# Altium PCB stm32f103.PcbDoc (part 1 of 2)
Units mm, origin at the board's own origin, x right, y up, seen from the top; angles counter-clockwise.
Board outline 73.39 x 86.21 mm, 2 copper layers (Top Layer, Bottom Layer); 96 components, 127 nets, 522 pads, 347 vias.
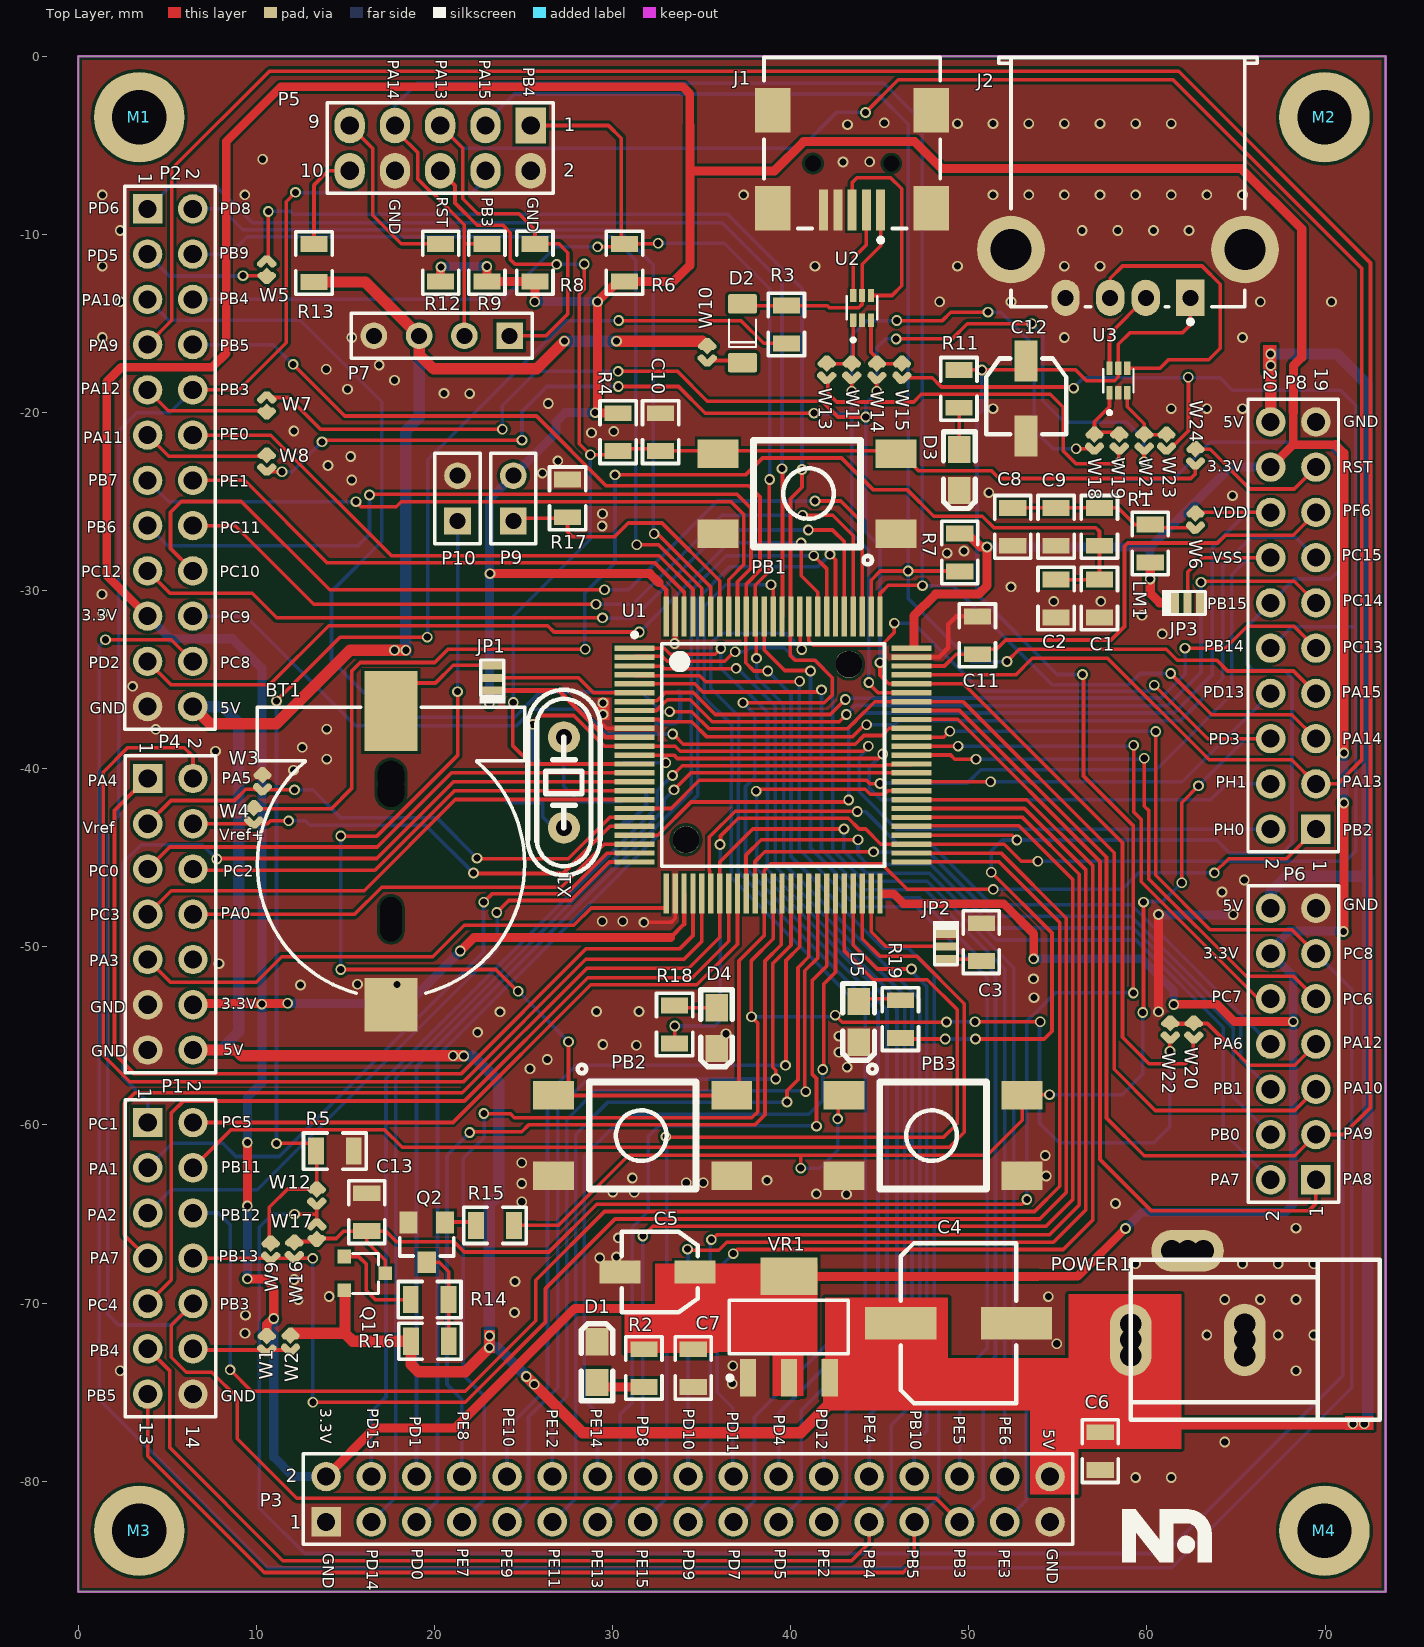
[diagram p0: Top Layer view]
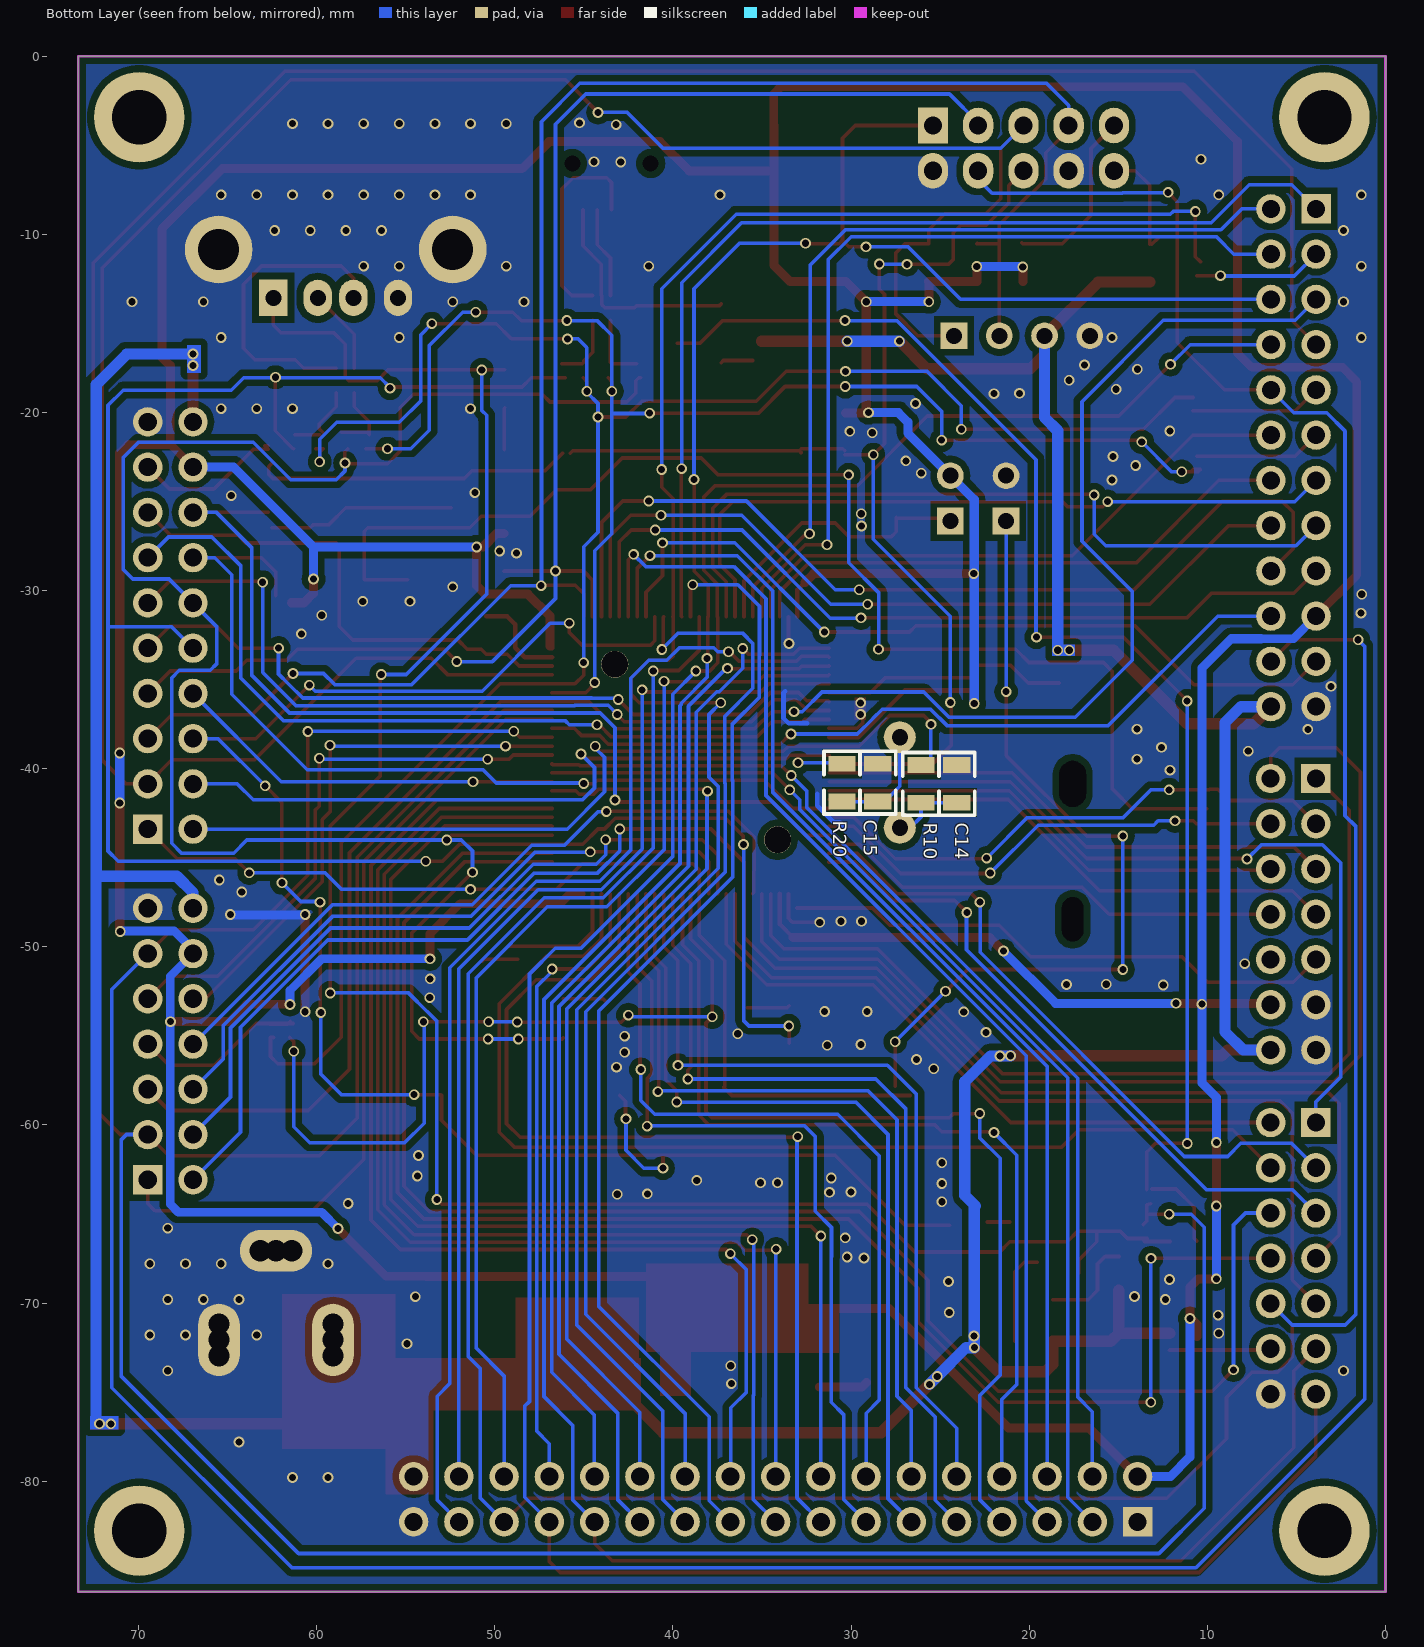
[diagram p1: Bottom Layer view, seen from below]
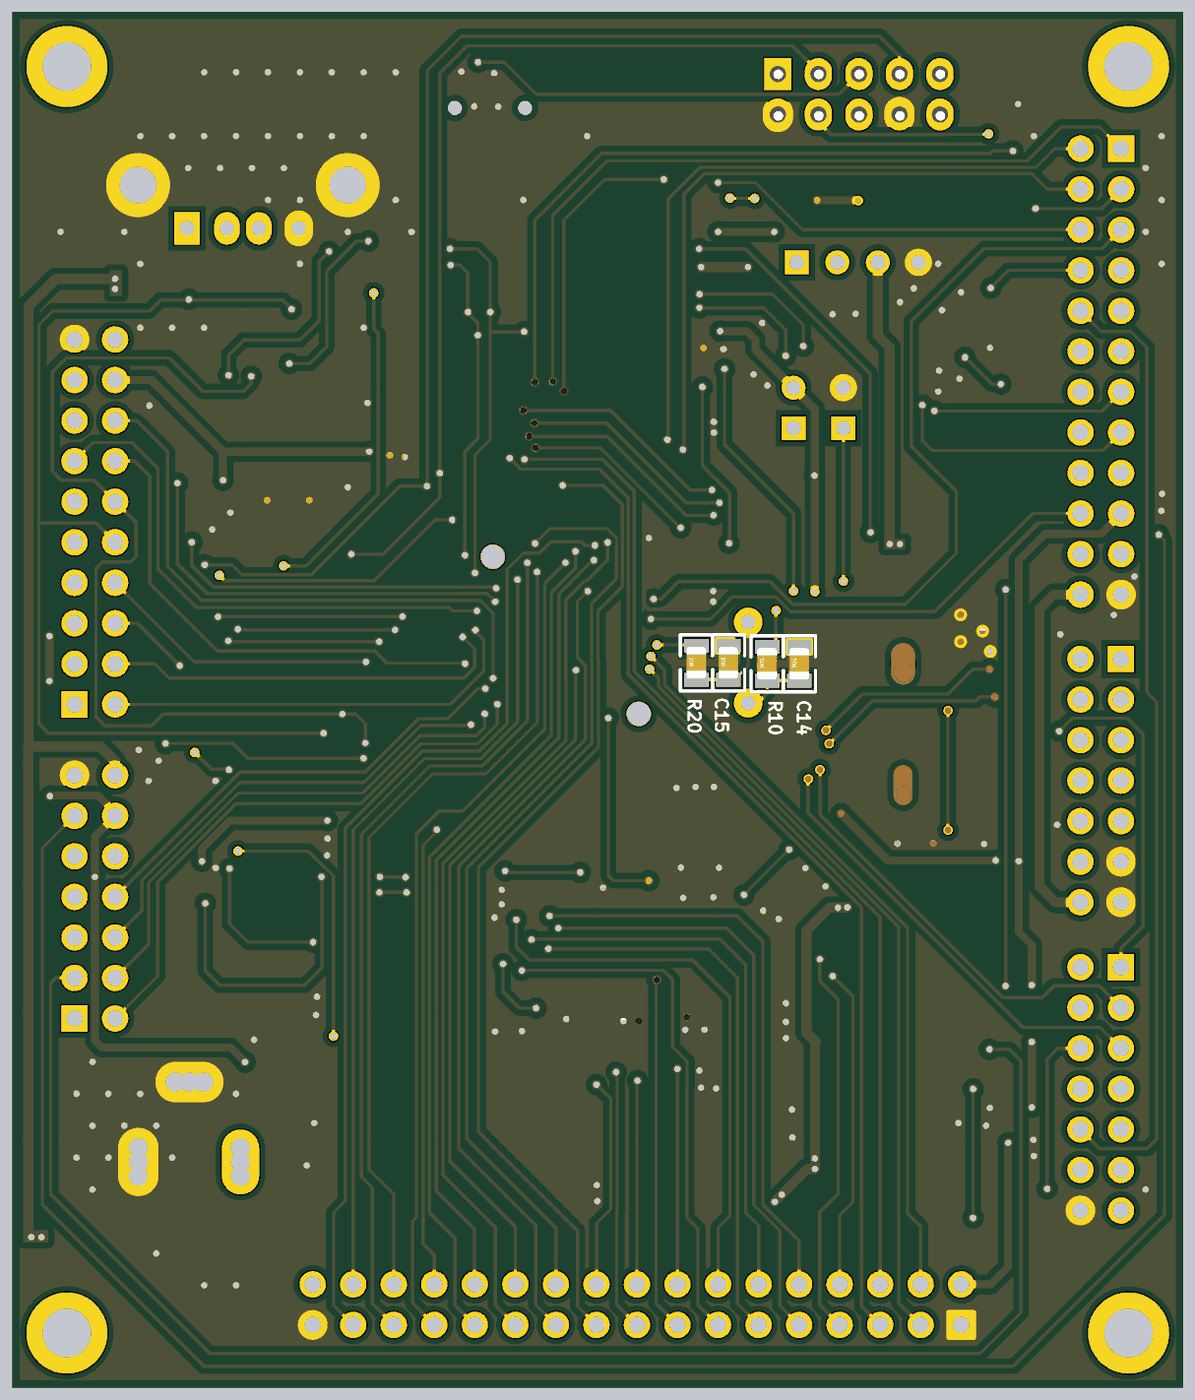
[diagram p3: 3D render of the assembled board from below, using the file's embedded part models]

## Layer stack, top to bottom
Top Layer: signal copper 0.0356
Dielectric: dielectric 0.32, FR-4, Dk 4.8
Bottom Layer: signal copper 0.0356

## Board outline
0,-84.517 0,0 73.392,0 73.392,-86.209 0,-86.209

## Design rules (kind name [scope] priority, off if disabled: settings)
Clearance [All] p1: gap=0.165
ComponentClearance [All] p1: gap=0 collisioncheckmode=3 verticalgap=0 showdistances=FALSE
PolygonConnect [All] p1: connectstyle=Direct reliefconductorwidth=0.254 reliefentries=4 polygonreliefangle="90 Angle"
RoutingVias [All] p1: holewidth=0.4 width=0.6 viastyle="Through Hole" minholewidth=0.4 minwidth=0.6 maxholewidth=0.4 maxwidth=0.6
SilkscreenOverComponentPads SilkToSolderMaskClearance [IsPad] p1: minsilkscreentomaskgap=0.254
SolderMaskExpansion [All] p1: expansion=0.102
Width [All] p1: maxlimit=2.54 minlimit=0.203 preferedwidth=0.203 minimp=50.000000 maximp=50.000000 favimp=50.000000
26 further rules are at their usual default settings.

## Components (designator, comment, footprint, x,y, rotation, side; value= is the part's Value field where it differs from the comment)
BT1 "BAT3volt" BTH1220 17.563,-44.055 r270 top
C1 "1uF" 0805 57.331,-30.445 r90 top
C2 "100nF" 0805 54.897,-30.445 r90 top
C3 "2.2uF" 0805 50.701,-49.739 r90 top
C4 "100uf" CAP470 49.422,-71.127 r180 top
C5 "10uf" CAP10 32.525,-68.253 r0 top
C6 "100nF" 0805 57.372,-78.306 r270 top
C7 "100nF" 0805 34.531,-73.644 r270 top
C8 "1uF" 0805 52.463,-26.421 r90 top
C9 "100nF" 0805 54.897,-26.421 r90 top
C10 "100nF" 0805 32.697,-21.107 r270 top
C11 "2.2uF" 0805 50.481,-32.515 r90 top
C12 "10uF-16V" CAP10 53.215,-19.225 r90 top
C13 "10uf" 0805 16.205,-64.895 r270 top
C14 "10pF" 0805 24.068,-40.847 r90 bottom
C15 "10pF" 0805 28.504,-40.787 r90 bottom
D1 "LED0" LED_0805 29.126,-74.426 r90 top
D2 "D Schottky" "SOD80, LL-34" 37.295,-15.561 r270 top
D3 "LED0" LED_0805 49.468,-22.117 r270 top
D4 "LED0" LED_0805 35.84,-53.443 r270 top
D5 "LED0" LED_0805 43.814,-53.098 r270 top
J1 "1-1470156-2" 440247 43.45,-0.779 r90 top
J2 "USBH" 787761 58.933,-0.079 r90 top
JP1 "Jumper" JT3 23.235,-34.931 r90 top
JP2 "Jumper" JT3 48.729,-49.959 r270 top
JP3 "Jumper" JT3 62.25,-30.685 r0 top
LM1 "10uH" 0805 60.183,-27.357 r90 top
M1 "Screw3mm" "Board Screw 3mm"#1 3.438,-3.528 r0 top
M2 "Screw3mm" "Board Screw 3mm"#2 69.917,-3.527 r0 top
M3 "Screw3mm" "Board Screw 3mm"#3 2.537,-80.537 r0 top
M4 "Screw3mm" "Board Screw 3mm"#4 68.387,-80.608 r0 top
P1 "EMAC" HDR2X7 3.909,-59.862 r270 top
P2 "INTERFACE" HDR2X12 3.899,-8.576 r270 top
P3 "LCD" HDR2X17 13.919,-82.274 r0 top
P4 "ANALOG" HDR2X7 3.909,-40.551 r270 top
P5 "Header 5X2" HDR2X5 25.408,-3.899 r180 top locked
P6 "TIMER" HDR2X7 69.482,-63.076 r90 top
P7 "SWD" HDR1X4 24.223,-15.699 r180 top
P8 "GPIO" HDR2X10 69.482,-43.394 r90 top
P9 "BOOT1" HDR1X2 24.43,-26.093 r90 top
P10 "BOOT2" HDR1X2 21.301,-26.093 r90 top
PB1 "PB_SMD4" PB_SMD4 40.916,-24.561 r180 top
PB2 "PB_SMD4" PB_SMD4 31.692,-60.592 r0 top locked
PB3 "PB_SMD4" PB_SMD4 47.993,-60.592 r0 top locked
POWER1 "POWER" "POWER JACK" 62.283,-70.005 r90 top
Q1 "MOSFET-P" "SUPER SOT_3" 17.239,-68.332 r270 top
Q2 "2N3904" SOT-23 20.6,-65.442 r180 top
R1 "47R" 0805 57.331,-26.421 r90 top
R2 "100" 0805 31.761,-73.644 r270 top
R3 "47K" 0805 39.756,-15.064 r90 top
R4 "10K" 0805 30.313,-21.107 r270 top
R5 "68K" 0805 14.415,-61.467 r0 top
R6 "10K" 0805 30.671,-11.599 r270 top
R7 "10K" 0805 49.486,-27.862 r90 top
R8 "10K" 0805 25.645,-11.599 r270 top
R9 "10K" 0805 22.947,-11.599 r270 top
R10 "0" 0805 26.076,-40.847 r90 bottom
R11 "330R" 0805 49.441,-18.676 r90 top
R12 "0R" 0805 20.352,-11.599 r270 top
R13 "0R" 0805 13.242,-11.617 r270 top
R14 "10K" 0805 19.734,-69.803 r0 top
R15 "1K" 0805 23.403,-65.638 r180 top
R16 "100K" 0805 19.75,-72.142 r180 top
R17 "10K" 0805 27.475,-24.827 r90 top
R18 "180" 0805 33.482,-54.359 r270 top
R19 "180" 0805 46.159,-54.057 r270 top
R20 "0" 0805 30.507,-40.787 r90 bottom
U1 "STM32F103VET6" LQFP100 39.015,-39.236 r0 top locked
U2 "USBLC6-2P6" SOT50P160X60-6N 44.008,-14.132 r90 top
U3 "USBLC6-2P6" SOT50P160X60-6N 58.393,-18.214 r90 top
VR1 "ASM1117 3.3V" REGOLATOR 39.892,-71.015 r90 top
W1 "Jumper" JP2_SMD 10.59,-72.191 r90 top
W2 "Jumper" JP2_SMD 11.922,-72.155 r90 top
W3 "Jumper" JP2_SMD 10.355,-40.696 r90 top
W4 "Jumper" JP2_SMD 9.869,-42.564 r90 top
W5 "Jumper" JP2_SMD 10.589,-11.992 r270 top
W6 "Jumper" JP2_SMD 62.721,-26.016 r90 top
W7 "Jumper" JP2_SMD 10.589,-19.618 r270 top
W8 "Jumper" JP2_SMD 10.596,-22.75 r90 top
W9 "Jumper" JP2_SMD 10.81,-66.995 r90 top
W10 "Jumper" JP2_SMD 35.319,-16.627 r90 top
W11 "Jumper" JP2_SMD 43.434,-17.597 r90 top
W12 "Jumper" JP2_SMD 13.399,-63.957 r90 top
W13 "Jumper" JP2_SMD 42.027,-17.599 r90 top
W14 "Jumper" JP2_SMD 44.84,-17.599 r90 top
W15 "Jumper" JP2_SMD 46.247,-17.599 r90 top
W16 "Jumper" JP2_SMD 12.142,-66.95 r90 top
W17 "Jumper" JP2_SMD 13.392,-66.042 r270 top
W18 "Jumper" JP2_SMD 57.052,-21.579 r90 top
W19 "Jumper" JP2_SMD 58.448,-21.579 r90 top
W20 "Jumper" JP2_SMD 62.629,-54.633 r90 top
W21 "Jumper" JP2_SMD 59.844,-21.579 r90 top
W22 "Jumper" JP2_SMD 61.312,-54.633 r90 top
W23 "Jumper" JP2_SMD 61.095,-21.576 r90 top
W24 "Jumper" JP2_SMD 62.721,-22.406 r90 top
X1 "HC-49S-C16QSA-8M(jfvny)(with socket)" XTAL_DIP 27.233,-40.76 r0 top (schematic designator Y1)

## Footprints (in the part's own frame and the unit in brackets; to place one, negate y for a bottom-side part, rotate by r counter-clockwise, add the part's x,y. Pads: shape width x height; smd on the part's side, far side on the other; paste and mask are expansions set on the pad)
0805 [mil]
  rect 35x60 smd mask+4: 1(-41.75,0) 2(41.75,0)
  silkscreen extent -69,-40 69,40, body extent -39,-24 40,25, height 31
440247 [mm] "Connector; USB2.0, Type B, SM; 5 Position; Right Angle"
  rect 2.3x0.5 smd: 1(-7.85,-1.6) 2(-7.85,-0.8) 3(-7.85,0) 4(-7.85,0.8) 5(-7.85,1.6)
  rect 2.5x2 smd: 6(-7.75,4.45) 7(-2.25,4.45) 8(-7.75,-4.45) 9(-2.25,-4.45)
  round 0.6 hole 0.9 unplated: MH1(-5.25,2.2) MH2(-5.25,-2.2)
  silkscreen extent -9.67,-4.95 0.7,4.95
787761 [mm] "Connector; USB1.1, Type A, Thru-Hole; 4 Position; Right Angle"
  rect 2.032x1.6 hole 0.9: 1(-13.49,-3.5)
  oval 2.032x1.6 hole 0.9: 2(-13.49,-1) 3(-13.49,1)
  oval 2.032x1.575 hole 0.9: 4(-13.49,3.5)
  round 3.8 hole 2.3: 5(-10.78,6.57) 6(-10.78,-6.57)
  silkscreen extent -14.96,-7.25 0,7.25
"Board Screw 3mm"#1 [mil]
  round 200 hole 120: 0(-0.35,3.9)
"Board Screw 3mm"#2 [mil]
  round 200 hole 120: 0(1.81,3.86)
"Board Screw 3mm"#3 [mil]
  round 200 hole 120: 0(35.12,-88.31)
"Board Screw 3mm"#4 [mil]
  round 200 hole 120: 0(62.05,-85.51)
BTH1220 [mm] "COIN CELL BATTERY HOLDER 1220 12mm"
  rect 4.5x3 smd: 1(-7.3,0)
  rect 3x3 smd: 2(9.2,0)
  round 1.5 hole 1.5 slot 2.6 at 0 deg unplated: ""(-3.2,0)
  round 1 hole 1.2 slot 2.5 at 0 deg unplated: ""(4.4,0)
  silkscreen extent -7.5,-7.5 8.54,7.5, body extent -8.5,-7.4 10.3,7.35, height 4.26
CAP10 [mm]
  rect 2.3x1.3 smd: 1(2.1,0) 2(-2.1,0)
  silkscreen extent -2,-2.25 2.25,2.25
CAP470 [mm]
  rect 4x1.8 smd: 1(3.25,0) 2(-3.25,0)
  silkscreen extent -3.25,-4.5 3.25,4.5
HDR1X2 [mm] "Connector; Header; 2 Position"
  rect 1.5x1.5 hole 0.9: 1(0,0)
  round 1.5 hole 0.9: 2(2.54,0)
  silkscreen extent -1.27,-1.27 3.81,1.27
HDR1X4 [mm] "Connector; Header; 4 Position"
  rect 1.5x1.5 hole 0.9: 1(0,0)
  round 1.5 hole 0.9: 2(2.54,0) 3(5.08,0) 4(7.62,0)
  silkscreen extent -1.27,-1.27 8.89,1.27
HDR2X5 [mm]
  rect 1.7x2 hole 1.016 mask+0.102: 1(0,0)
  oval 1.7x2 hole 1.016 mask+0.102: 2(0,2.54) 3(2.54,0) 4(2.54,2.54) 5(5.08,0) 6(5.08,2.54) 7(7.62,0) 8(7.62,2.54) 9(10.16,0) 10(10.16,2.54)
  silkscreen extent -1.27,-1.27 11.43,3.81, body extent -1.24,-1.18 11.46,3.82, height 8.58
HDR2X7 [mil]
  rect 65x65 hole 40: 1(0,0)
  round 65 hole 40: 2(0,100) 3(100,0) 4(100,100) 5(200,0) 6(200,100) 7(300,0) 8(300,100) 9(400,0) 10(400,100) 11(500,0) 12(500,100) 13(600,0) 14(600,100)
  silkscreen extent -50,-50 650,150
HDR2X10 [mil] "Connector; Header; 10x2 Position"
  rect 65x65 hole 40: 1(0,0)
  round 65 hole 40: 2(0,100) 3(100,0) 4(100,100) 5(200,0) 6(200,100) 7(300,0) 8(300,100) 9(400,0) 10(400,100) 11(500,0) 12(500,100) 13(600,0) 14(600,100) 15(700,0) 16(700,100) 17(800,0) 18(800,100) 19(900,0) 20(900,100)
  silkscreen extent -50,-50 950,150
HDR2X12 [mil]
  rect 65x65 hole 40: 1(0,0)
  round 65 hole 40: 2(0,100) 3(100,0) 4(100,100) 5(200,0) 6(200,100) 7(300,0) 8(300,100) 9(400,0) 10(400,100) 11(500,0) 12(500,100) 13(600,0) 14(600,100) 15(700,0) 16(700,100) 17(800,0) 18(800,100) 19(900,0) 20(900,100) 21(1000,0) 22(1000,100) 23(1100,0) 24(1100,100)
  silkscreen extent -50,-50 1150,150
HDR2X17 [mil]
  rect 65x65 hole 40: 1(0,0)
  round 65 hole 40: 2(0,100) 3(100,0) 4(100,100) 5(200,0) 6(200,100) 7(300,0) 8(300,100) 9(400,0) 10(400,100) 11(500,0) 12(500,100) 13(600,0) 14(600,100) 15(700,0) 16(700,100) 17(800,0) 18(800,100) 19(900,0) 20(900,100) 21(1000,0) 22(1000,100) 23(1100,0) 24(1100,100) 25(1200,0) 26(1200,100) 27(1300,0) 28(1300,100) 29(1400,0) 30(1400,100) 31(1500,0) 32(1500,100) 33(1600,0) 34(1600,100)
  silkscreen extent -50,-50 1650,150
JP2_SMD [mil]
  oct 15x30 smd rot 45: 1(-18,-8) 2(18,7)
  oct 15.75x30 smd rot 135: 1(-18,8)
  rect 26x26 smd rot 45: 2(13,0)
  oct 15x30 smd rot 135: 2(18,-7)
JT3 [mil]
  rect 18x45 smd mask+4: 1(-27,0) 2(1,0) 3(29,0)
  silkscreen extent -55,-30 41,28
LED_0805 [mil]
  rect 60x50 smd: 1(-1,0) 2(89,0)
  silkscreen extent -41,-35 129,35
LQFP100 [mm] "TSQFP, 100-Leads, Body 17.0x17.0mm (max), Pitch 0.50mm, IPC Medium Density"
  rect 2.25x0.3 smd mask+0.036: 1(-7.775,6) 2(-7.775,5.5) 3(-7.775,5) 4(-7.775,4.5) 5(-7.775,4) 6(-7.775,3.5) 7(-7.775,3) 8(-7.775,2.5) 9(-7.775,2) 10(-7.775,1.5) 11(-7.775,1) 12(-7.775,0.5) 13(-7.775,0) 14(-7.775,-0.5) 15(-7.775,-1) 16(-7.775,-1.5) 17(-7.775,-2) 18(-7.775,-2.5) 19(-7.775,-3) 20(-7.775,-3.5) 21(-7.775,-4) 22(-7.775,-4.5) 23(-7.775,-5) 24(-7.775,-5.5) 25(-7.775,-6) 51(7.775,-6) 52(7.775,-5.5) 53(7.775,-5) 54(7.775,-4.5) 55(7.775,-4) 56(7.775,-3.5) 57(7.775,-3) 58(7.775,-2.5) 59(7.775,-2) 60(7.775,-1.5) 61(7.775,-1) 62(7.775,-0.5) 63(7.775,0) 64(7.775,0.5) 65(7.775,1) 66(7.775,1.5) 67(7.775,2) 68(7.775,2.5) 69(7.775,3) 70(7.775,3.5) 71(7.775,4) 72(7.775,4.5) 73(7.775,5) 74(7.775,5.5) 75(7.775,6)
  rect 0.3x2.25 smd mask+0.036: 26(-6,-7.775) 27(-5.5,-7.775) 28(-5,-7.775) 29(-4.5,-7.775) 30(-4,-7.775) 31(-3.5,-7.775) 32(-3,-7.775) 33(-2.5,-7.775) 34(-2,-7.775) 35(-1.5,-7.775) 36(-1,-7.775) 37(-0.5,-7.775) 38(0,-7.775) 39(0.5,-7.775) 40(1,-7.775) 41(1.5,-7.775) 42(2,-7.775) 43(2.5,-7.775) 44(3,-7.775) 45(3.5,-7.775) 46(4,-7.775) 47(4.5,-7.775) 48(5,-7.775) 49(5.5,-7.775) 50(6,-7.775) 76(6,7.775) 77(5.5,7.775) 78(5,7.775) 79(4.5,7.775) 80(4,7.775) 81(3.5,7.775) 82(3,7.775) 83(2.5,7.775) 84(2,7.775) 85(1.5,7.775) 86(1,7.775) 87(0.5,7.775) 88(0,7.775) 89(-0.5,7.775) 90(-1,7.775) 91(-1.5,7.775) 92(-2,7.775) 93(-2.5,7.775) 94(-3,7.775) 95(-3.5,7.775) 96(-4,7.775) 97(-4.5,7.775) 98(-5,7.775) 99(-5.5,7.775) 100(-6,7.775)
  silkscreen extent -7.9,-6.25 6.25,6.87, body extent -8,-8 8.01,8.01, height 1.6
PB_SMD4 [mm]
  rect 2.3x1.6 smd mask+0.102: 1(-5,2.25) 2(5,2.25) 3(-5,-2.25) 4(5,-2.25)
  silkscreen extent -3.65,-3 3,3.97, body extent -4.98,-3 5.02,3, height 5.08
"POWER JACK" [mil] "BY:SAFAGHI"
  round 47 hole 47.24: 1(-116,126) 1(-46,126) 2(-116,-126) 2(-46,-126) 2(116,-35) 2(116,35)
  oval 160x92 hole 47.24: 1(-81,126) 2(-81,-126)
  oval 92x160 hole 47.24: 2(116,0)
  silkscreen extent -258,-425 96,126
REGOLATOR [mm]
  rect 2.1x0.9 smd: 1(-3.18,2.3) 3(-3.18,-2.3) 4(-3.18,0)
  rect 2.1x3.2 smd: 4(2.52,0)
  silkscreen extent -3.31,-3.35 1.17,3.42
"SOD80, LL-34" [mm] "Diode, MiniMELF"
  round 0.5 on Mech15: 0(0,0)
  rrect25% 1.1x1.65 smd: A(-1.65,0) K(1.65,0)
  silkscreen extent -0.76,-0.76 0.76,0.76, body extent -1.8,-0.75 1.8,0.75, height 1.47
SOT50P160X60-6N [mm]
  rrect8% 0.75x0.35 smd: 1(-0.69,0.5) 2(-0.69,0) 3(-0.69,-0.5) 4(0.69,-0.5) 5(0.69,0) 6(0.69,0.5)
  silkscreen extent -1.9,-0.85 0.65,0.85
SOT-23 [mil]
  rect 40x48 smd mask+4: 1(0.58,1.15) 2(80.58,1.15) 3(40.58,89.15)
  silkscreen extent -19,35 101,75, body extent -17,-5 97,105, height 49
"SUPER SOT_3" [mm]
  rect 0.76x0.76 smd: 1(0,0) 2(-0.95,-2.29) 3(0.95,-2.29)
  silkscreen extent -1.12,-1.83 1.12,-0.37
XTAL_DIP [mm]
  round 1.8 hole 0.9: 1(0.036,-2.555) 2(0.036,2.525)
  silkscreen extent -2,-5.22 2.07,5.19

## Part data
BT1: library part BATH_CR1220_CR2032, "BATTERY HOLDER, CR1220/CR2032"
C1 C2 C3 C8 C9 C11: library part "CAP SMD 1206", "CAP 1206"
C4 C5: library part "Cap Pol1", "Polarized Capacitor (Radial)"
C6 C7 C13: library part "Cap Semi", "Capacitor (Semiconductor SIM Model)"
C10 C14 C15: library part CAP, "Capacitor"
C12: library part 3-CAP-POL, "Polarized Capacitor"
D1 D3 D4 D5: "Typical INFRARED GaAs LED"
D2: "Schottky Diode"
J1: "USB 1.1, Right Angle, Thru-Hole, B Type, Receptacle, 4 Position, Black"
J2: library part 787761-3, "USB 1.1, Right Angle, Thru-Hole, A Type, Receptacle, 4 Position, Natural"
JP1 JP2 JP3: library part "Jumper Selector", "Jumper Selector"
LM1: library part "L SMA 0.25W", "Inductor"
M1 M2 M3 M4: library part "Board Screw 3mm", "Board Screw With Spacer 3mm"
P1 P4 P6: library part "Header 7X2", "Header, 7-Pin, Dual row"
P2: library part "Header 12X2", "Header, 12-Pin, Dual row"
P3: library part "Header 17X2", "Header, 17-Pin, Dual row"
P5: "Header, 5-Pin, Dual row"
P7: library part "Header 4", "Header, 4-Pin"
P8: library part "Header 10X2", "Header, 10-Pin, Dual row"
P9 P10: library part "Header 2", "Header, 2-Pin"
POWER1: library part "Header 2H", "Header, 2-Pin, Right Angle"
Q1: "P-Channel MOSFET"
Q2: "NPN General Purpose Amplifier"
R1: library part "RES 1206 0.25W", "RES 1206"
R2: library part Res3, "Resistor"
R3 R5 R6 R7 R8 R9 R10 R11 R12 R13 R14 R15 R16 R17 R18 R19 R20: library part Res1, "Resistor"
R4: library part res1, "Resistor"
U1: "ARM Cortex-M3 32-bit MCU, 512 KB Flash, 64 KB Internal RAM, 80 I/Os, 100-pin LQFP, -40 to 85 degC, Tray"
VR1: library part "Volt Reg_1", "Voltage Regulator"
W1 W2 W3 W4 W5 W6 W7 W8 W9 W10 W11 W12 W13 W14 W15 W16 W17 W18 W19 W20 W21 W22 W23 W24: "Jumper Wire"
X1: library part CRYSTAL, "Crystal"

## Free pads (board coordinates)
  round 1.524 hole 1.5: 0(34.124,-43.989) 0(43.267,-34.142)

## Via types
v1: diameter 0.6, hole 0.4, Top Layer to Bottom Layer, tented both sides, 320 vias
v2: diameter 0.6, hole 0.4, Top Layer to Bottom Layer, 27 vias

## Nets (pads, with @x,y where several pads share a name; then routed paths per layer and width w, separated by ;. In a path a pad name is that pad's centre, name@x,y a point inside that pad or via, vN(x,y) a via of type N, cw(c..) or ccw(c..) an arc to the next point about the centre after c; other vN are vias at no path point)
3V3: C5.1 C7.1 JP1.1 JP3.1 LM1.1 P2.19 P3.2 P4.12 P6.12 P8.18 P9.2 R2.1 R4.1 R6.2 R7.2 R8.2 R9.2 R12.2 U1.11 U1.28 U1.50 U1.75 U1.100 VR1.4 W1.2 | length 442.2
  Top Layer w0.254: JP1.1@23.235,-35.617 23.241,-35.611 26.976,-35.611 29.601,-38.236 U1.11@31.24,-38.236 ; 32.597,-29.549 33.015,-29.967 U1.100@33.015,-31.461 ; 33.259,-49.477 34.015,-48.721 U1.28@34.015,-47.011 ; U1.75@46.79,-33.236 U1.75@46.913,-33.236
  Top Layer w0.483: P2.19@3.899,-31.436 1.613,-29.15 1.613,-18.275 2.419,-17.469 7.523,-17.469 8.313,-16.679 8.313,-4.796 11.384,-1.725 33.953,-1.725 34.336,-2.108 34.336,-3.899 ; U1.50@45.146,-47.011 45.771,-47.011 46.331,-47.571 51.951,-47.571 53.639,-49.259 v1(53.639,-50.674) ; 53.853,-68.495 56.113,-68.495 v1(58.798,-65.81) ; v1(61.499,-53.232) 63.94,-53.232 64.897,-54.189 68.197,-54.189 v1(68.209,-54.201) ; P8.18@66.942,-23.074 68.209,-21.807 ; 68.198,-19.285 68.198,-19.988 68.208,-19.998 68.209,-21.807 ; 70.577,-21.807 68.209,-21.807
  Top Layer w0.508: P4.12@6.449,-53.251 6.532,-53.168 v1(11.762,-53.168) ; v1(9.499,-68.636) 10.507,-68.636 10.982,-69.111 v1(10.982,-70.867) ; v1(9.499,-64.551) v1(9.499,-60.981) ; W1.2@10.59,-71.861 10.59,-71.192 v1@10.915,-70.867 ; P3.2@13.919,-79.734 16.637,-77.016 21.157,-77.016 27.884,-70.289 34.056,-70.289 34.057,-70.288 ; R12.2@20.352,-12.66 20.352,-11.851 v2(20.368,-11.835) ; v1(21.452,-50.237) 22.212,-49.477 33.259,-49.477 ; v1(22.947,-11.814) R9.2@22.947,-12.66 R8.2@25.645,-12.66 25.635,-12.67 v1(25.635,-13.79) ; v2(23.088,-36.338) 23.088,-35.764 JP1.1@23.107,-35.745 ; v1(23.117,-29.05) 32.098,-29.05 32.597,-29.549 ; v1(29.023,-20.012) 29.057,-20.047 R4.1@30.313,-20.047 R4.1@29.992,-20.047 ; v1@29.152,-20.012 v1(29.152,-13.787) 30.279,-12.66 R6.2@30.671,-12.66 33.416,-12.66 34.336,-11.74 34.336,-6.439 ; 34.336,-3.899 34.336,-6.439 ; VR1.4@39.892,-68.495 53.853,-68.495 ; U1.75@46.913,-33.122 46.913,-31.425 48.139,-30.199 50.543,-30.199 51.022,-29.72 v1(51.022,-27.557) 50.663,-27.557 49.907,-26.802 R7.2@49.486,-26.802 ; LM1.1@60.183,-28.418 60.183,-30.158 60.71,-30.685 JP3.1@61.406,-30.685 ; 68.212,-19.995 68.212,-17.383 68.688,-16.907 68.688,-9.702 65.298,-6.312 48.47,-6.312 46.955,-4.797 40.733,-4.797 39.091,-6.439 34.336,-6.439 ; 70.577,-21.807 71.052,-22.282 v1(71.052,-39.12) ; v1(71.022,-49.138) 71.052,-49.168 v1(71.052,-41.927)
  Bottom Layer w0.483: P2.19@3.899,-31.436 5.169,-32.706 6.978,-32.706 ; v1(53.639,-50.674) 59.72,-50.674 61.499,-52.453 v1(61.499,-53.232) ; v1(58.798,-65.81) 59.716,-64.892 67.771,-64.892 68.209,-64.454 v1(68.209,-54.201) 68.209,-51.643 P6.12@66.942,-50.376 66.942,-50.166 67.999,-49.109 v1@71.022,-49.109
  Bottom Layer w0.508: 6.978,-32.706 8.659,-32.706 10.313,-34.36 v1(10.313,-53.216) 10.313,-57.637 9.499,-58.451 v1(9.499,-60.981) ; v1(9.499,-68.636) v1(9.499,-64.551) ; v1(10.982,-70.867) 10.982,-78.633 12.083,-79.734 P3.2@13.919,-79.734 ; v1(11.762,-53.168) 18.521,-53.168 v1(21.452,-50.237) ; v2@20.368,-11.814 v1(22.947,-11.814) ; v2(23.088,-36.338) 23.088,-24.895 P9.2@24.43,-23.553 26.816,-21.167 26.816,-20.541 27.345,-20.012 v1(29.023,-20.012) ; v1(25.635,-13.79) 25.638,-13.787 v1(29.152,-13.787) ; v1@51.022,-27.566 60.175,-27.566 ; v1(60.175,-29.353) 60.175,-27.566 ; P8.18@66.942,-23.074 64.667,-23.074 60.175,-27.566 ; v1(71.022,-49.138) v1@71.022,-49.109 ; v1(71.052,-41.927) v1(71.052,-39.12)
5V: C4.1 C6.1 P2.24 P3.34 P4.14 P6.14 P7.3 P8.20 POWER1.1 Q1.3 R13.2 R16.2 VR1.3 W2.2 W10.2 | length 245.6
  Top Layer w0.635: P2.24@6.439,-36.516 7.402,-37.479 11.136,-37.479 15.265,-33.35 v1(18.399,-33.35) ; P4.14@6.449,-55.791 8.859,-55.791 9.18,-56.112 v1(21.051,-56.112) v1@21.636,-56.112 ; W2.2@12.1,-71.698 14.977,-71.698 ; R13.2@13.242,-12.678 16.121,-12.678 P7.3@19.143,-15.699 19.143,-16.742 19.957,-17.556 25.739,-17.556 v1(27.294,-16.001) ; Q1.3@14.981,-69.284 14.981,-71.698 15.425,-72.142 R16.2@18.689,-72.142 18.689,-73.436 19.109,-73.856 21.727,-73.856 v1(23.085,-72.498) ; v1(25.164,-74.116) 28.317,-77.268 40.561,-77.268 42.192,-75.637 VR1.3@42.192,-74.195 ; v1(30.217,-16.001) 35.028,-16.001 ; POWER1.1@59.083,-72.062 60.352,-73.332 60.352,-76.777 v1@72.192,-76.777 ; P8.20@66.942,-20.534 v1(66.942,-16.727)
  Bottom Layer w0.635: P2.24@6.439,-36.516 8.112,-36.516 9.013,-37.417 9.013,-54.771 7.993,-55.791 P4.14@6.449,-55.791 ; v1(18.399,-33.35) 18.399,-21.033 19.143,-20.289 P7.3@19.143,-15.699 ; v1(21.051,-56.112) 21.062,-56.123 22.176,-56.123 23.615,-57.562 23.615,-63.949 23.016,-64.548 23.085,-64.616 v1(23.085,-72.498) 23.54,-72.498 23.543,-72.495 v1(25.164,-74.116) v1@25.605,-74.556 ; v1(27.294,-16.001) v1(30.217,-16.001) ; v1@66.935,-16.727 70.653,-16.727 72.365,-18.439 72.365,-46.039 ; P6.14@66.942,-47.836 66.942,-46.954 67.857,-46.039 72.365,-46.039 ; v1(72.192,-76.771) 72.383,-76.58 72.383,-46.057 72.365,-46.039
  other v1: 71.554,-76.775 25.604,-74.557 23.1,-71.843 21.645,-56.13 17.757,-33.351 66.946,-17.365
BOOT: P9.1 R17.1 U1.94 | length 16.4
  Top Layer w0.203: P9.1@24.43,-26.093 P9.1@24.799,-25.723 ; P9.1@24.799,-25.939 R17.1@27.475,-25.939 ; R17.1@27.475,-25.888 R17.1@27.475,-25.939 ; U1.94@36.015,-31.461 36.015,-29.447 32.777,-26.209 30.884,-26.209 30.103,-26.99 27.757,-26.99 27.475,-26.708 R17.1@27.475,-25.939
GND: BT1.2 C1.1 C2.1 C3.2 C4.2 C5.2 C6.2 C7.2 C8.1 C9.1 C10.1 C11.2 C12.2 C13.1 C14.2 C15.2 D1.2 D3.2 D4.2 D5.2 J1.4 J1.5 J1.6 J1.7 J1.8 J1.9 J2.4 J2.5 J2.6 JP2.1 JP3.3 P1.14 P2.23 P3.1 P3.33 P4.11 P4.13 P5.2 P5.8 P6.13 P7.4 P8.19 P10.2 PB1.1 PB1.2 PB2.3 PB2.4 PB3.3 PB3.4 POWER1.2 Q2.2 R5.2 R17.2 U1.10 U1.27 U1.74 U1.99 U2.2 U3.2 VR1.1 W3.2 | length 28.8
  Top Layer w0.203: v1@29.354,-36.311 29.354,-37.432 29.658,-37.736 U1.10@31.24,-37.736 ; v1(31.759,-48.628) 33.285,-48.628 33.515,-48.398 U1.27@33.515,-47.011 ; v1(33.488,-32.971) 33.398,-32.971 33.357,-32.93 33.515,-32.772 U1.99@33.515,-31.461
  Top Layer w0.254: U1.74@46.79,-33.736 48.327,-33.736 48.853,-33.21 48.853,-31.904 49.302,-31.454 C11.2@50.481,-31.454
  Top Layer w0.508: v1(60.649,-53.644) v1(60.649,-48.187)
  Bottom Layer w0.203: v1(33.488,-32.971) v1@33.488,-32.96
  Bottom Layer w0.254: 30.406,-43.244 30.642,-43.008 30.966,-43.008 31.895,-42.079 31.895,-41.421 ; 32.458,-37.444 33.512,-37.444 33.796,-37.16 33.796,-35.748 33.709,-35.661
  Bottom Layer w0.508: v1(60.649,-48.187) 60.674,-48.212 64.818,-48.212 v1(64.843,-48.187)
  other v1: 59.361,-79.792 61.361,-79.792 64.361,-77.792 36.72,-74.518 2.361,-73.792 68.361,-73.792 36.756,-73.515 54.934,-72.276 63.361,-71.792 67.361,-71.792 69.361,-71.792 9.366,-71.69 9.398,-70.674 24.495,-70.528 12.361,-69.792 64.361,-69.792 66.361,-69.792 68.361,-69.792 14.094,-69.627 54.461,-69.633 24.53,-68.783 12.127,-68.675 59.361,-67.792 65.361,-67.792 67.361,-67.792 69.361,-67.792 29.279,-67.463 30.223,-67.411 30.328,-66.336 68.361,-65.792 58.235,-64.402 24.905,-64.311 43.129,-63.889 41.439,-63.867 31.217,-63.78 30.011,-63.759 24.905,-63.286 34.135,-63.239 35.089,-63.239 38.665,-63.109 31.115,-62.979 54.348,-62.864 24.905,-62.118 54.287,-61.71 25.364,-56.84 43.166,-56.754 26.332,-56.32 42.713,-55.92 31.339,-55.523 29.454,-55.48 42.713,-55.014 36.366,-54.88 22.427,-54.798 23.681,-53.651 29.1,-53.631 31.484,-53.631 53.654,-52.853 12.482,-52.138 17.908,-52.118 15.681,-52.097 53.629,-51.799 7.907,-50.942 29.42,-48.564 30.572,-48.564 64.208,-46.921 65.461,-46.252 7.708,-39.013 4.361,-37.792 29.467,-36.948 29.467,-36.303 3.063,-35.378 60.859,-32.434 59.717,-31.384 1.376,-31.269 54.764,-30.607 57.412,-30.607 1.337,-30.205 52.361,-29.792 48.781,-27.899 49.727,-27.781 29.418,-26.372 29.435,-25.688 64.796,-24.674 51.122,-24.505 15.361,-23.792 26.063,-23.409 14.031,-22.985 26.93,-22.719 15.301,-22.48 28.816,-21.145 30.07,-21.063 12.11,-21.047 51.361,-19.792 61.361,-19.792 63.361,-19.792 65.361,-19.792 26.39,-19.5 20.544,-18.93 21.977,-18.947 15.122,-18.702 17.76,-18.198 13.933,-17.579 16.897,-17.335 1.361,-15.792 15.361,-15.792 55.361,-15.792 65.361,-15.792 2.361,-13.792 48.361,-13.792 52.361,-13.792 66.361,-13.792 70.361,-13.792 1.361,-11.792 41.361,-11.792 49.361,-11.792 55.361,-11.792 57.361,-11.792 2.361,-9.792 56.361,-9.792 58.361,-9.792 60.361,-9.792 62.361,-9.792 1.361,-7.792 9.361,-7.792 37.361,-7.792 51.361,-7.792 53.361,-7.792 55.361,-7.792 57.361,-7.792 59.361,-7.792 61.361,-7.792 63.361,-7.792 65.361,-7.792 42.933,-5.947 44.432,-5.928 10.361,-5.792 43.189,-3.847 49.361,-3.792 51.361,-3.792 53.361,-3.792 55.361,-3.792 57.361,-3.792 59.361,-3.792 61.361,-3.792 45.25,-3.748
  other v2: 12.096,-40.079 13.958,-39.466 12.58,-38.803 13.958,-37.782
NetBT1_1: BT1.1 JP1.3 | length 5.3
  Top Layer w0.203: BT1.1@18.316,-35.191 20.057,-35.191 21.054,-34.194 JP1.3@23.235,-34.194
NetC3_1: C3.1 JP2.3 | length 2
  Top Layer w0.203: JP2.3@48.729,-50.696 50.597,-50.696 C3.1@50.701,-50.8
NetC12_1: C12.1 C13.2 J2.1 Q1.1 R11.2 U3.5 W16.2 W17.2 | length 119.3
  Top Layer w0.203: W16.2@12.1,-66.542 13.527,-66.542 W17.2@13.57,-66.499 ; W17.2@13.392,-66.372 14.488,-66.372 14.905,-65.955 C13.2@16.205,-65.955 ; Q1.1@17.239,-68.332 17.239,-67.584 16.205,-66.55 C13.2@16.205,-65.955 ; R11.2@49.441,-17.615 v2(50.733,-17.615) 56.002,-17.615 56.605,-18.218 58.182,-18.218 58.393,-18.007 U3.5@58.393,-17.524 58.393,-16.174 ; v2(53.255,-64.179) 52.978,-64.456 29.111,-64.456 26.435,-67.132 21.672,-67.132 21.1,-66.56 17.87,-66.56 17.265,-65.955 C13.2@16.205,-65.955 ; v2(56.378,-34.711) 56.434,-34.767 56.434,-40.413 59.237,-43.216 v2(59.237,-52.586) ; 58.422,-16.145 59.027,-15.54 61.982,-15.54 62.433,-15.089 J2.1@62.433,-13.569
  Bottom Layer w0.203: v2(50.733,-17.615) 50.733,-19.891 50.46,-20.164 50.46,-20.457 50.455,-20.462 50.455,-30.199 54.967,-34.711 v2(56.378,-34.711) ; v2(53.255,-64.179) 53.255,-54.159 53.777,-53.637 53.795,-53.637 54.846,-52.586 v2(59.237,-52.586)
NetC14_1: C14.1 R10.1 X1.1 | length 3.7
  Bottom Layer w0.203: C14.1@24.068,-41.908 R10.1@26.076,-41.908 26.076,-42.71 X1.1@26.682,-43.316
NetC15_1: C15.1 R20.1 X1.2 | length 6.3
  Bottom Layer w0.203: X1.2@27.269,-38.235 27.269,-40.988 28.128,-41.847 C15.1@28.504,-41.847 R20.1@30.507,-41.847
NetD1_1: D1.1 R2.2 | length 2.7
  Top Layer w0.508: D1.1@29.126,-74.451 29.379,-74.705 R2.2@31.761,-74.705
NetD2_A: D2.A J1.1 R3.2 U2.5 | length 12.6
  Top Layer w0.203: D2.A@37.295,-13.911 37.387,-14.004 R3.2@39.756,-14.004 42.035,-14.004 42.165,-14.134 43.813,-14.134 44.008,-13.939 U2.5@44.008,-13.442 ; U2.5@44.018,-13.432 44.018,-11.678 45.05,-10.646 J1.1@45.05,-8.629
NetD2_K: D2.K W10.1 | length 1.8
  Top Layer w0.203: W10.1@35.522,-17.084 37.168,-17.084 D2.K@37.295,-17.211
NetD3_1: D3.1 R11.1 | length 2.4
  Top Layer w0.203: R11.1@49.441,-19.737 49.468,-19.764 D3.1@49.468,-22.092
NetD4_1: D4.1 R18.1 | length 2.4
  Top Layer w0.203: R18.1@33.482,-53.299 33.601,-53.418 D4.1@35.84,-53.418
NetD5_1: D5.1 R19.1 | length 2.4
  Top Layer w0.203: D5.1@43.814,-53.032 43.933,-52.913 R19.1@46.165,-52.913
NetJ1_2: J1.2 U2.6 | length 5.1
  Top Layer w0.203: U2.6@43.508,-13.442 43.508,-11.332 44.25,-10.59 J1.2@44.25,-8.629
NetJ1_3: J1.3 U2.4 | length 12.1
  Top Layer w0.203: J1.3@43.45,-8.629 43.45,-7.099 43.723,-6.826 45.603,-6.826 46.23,-7.453 46.23,-12.899 45.687,-13.442 U2.4@44.508,-13.442
NetJ2_2: J2.2 U3.6 | length 4.8
  Top Layer w0.203: U3.6@57.893,-17.524 57.893,-15.609 J2.2@59.933,-13.569
NetJ2_3: J2.3 U3.4 | length 17.3
  Top Layer w0.203: J2.3@57.933,-13.569 57.933,-12.477 58.626,-11.784 63.091,-11.784 64.107,-12.8 64.107,-16.402 63.465,-17.044 61.209,-17.044 60.729,-17.524 U3.4@58.893,-17.524
NetJP1_2: JP1.2 U1.6 | length 8.3
  Top Layer w0.203: JP1.2@23.235,-34.906 28.1,-34.906 28.93,-35.736 U1.6@31.24,-35.736
NetJP2_2: JP2.2 U1.49 | length 7.2
  Top Layer w0.203: U1.49@44.515,-47.011 44.515,-49.157 45.315,-49.957 JP2.2@49.208,-49.957
NetP1_12: P1.12 W1.1 W2.1 | length 5.8
  Top Layer w0.203: P1.12@6.449,-72.562 6.449,-72.629 12.122,-72.629 W2.1@12.141,-72.648
NetP2_3: P2.3 W5.2 | length 7.2
  Top Layer w0.203: v1(9.261,-12.326) 10.585,-12.326 W5.2@10.589,-12.322
  Bottom Layer w0.203: P2.3@3.899,-11.116 5.124,-12.341 9.215,-12.341 9.23,-12.326 v1(9.261,-12.326)
NetP2_9: P2.9 W7.2 | length 7.4
  Top Layer w0.203: P2.9@3.899,-18.736 5.068,-19.905 W7.2@10.822,-19.905
NetP2_11: P2.11 W8.2 | length 7.2
  Top Layer w0.203: P2.11@3.899,-21.276 5.086,-22.463 W8.2@10.583,-22.463
NetP5_9: P5.9 R12.1 | length 10.1
  Top Layer w0.203: P5.9@15.248,-3.899 16.533,-5.184 16.533,-8.928 18.144,-10.539 R12.1@20.352,-10.539 R12.1@20.418,-10.473
NetP5_10: P5.10 R13.1 | length 6.2
  Top Layer w0.203: R13.1@12.752,-10.201 R13.1@13.121,-10.57 ; R13.1@13.242,-10.556 13.242,-7.241 14.044,-6.439 P5.10@15.248,-6.439
NetP6_7: P6.7 W20.2 W22.2 | length 10.8
  Top Layer w0.203: W22.2@61.312,-54.303 W22.2@61.617,-54.303 ; W22.2@61.49,-54.176 W22.2@61.617,-54.303 ; W20.2@62.629,-54.329 61.643,-54.329 W22.2@61.617,-54.303 ; P6.7@69.482,-55.456 68.293,-56.645 65.734,-56.645 63.392,-54.303 W20.2@62.629,-54.303 W22.2@61.617,-54.303
NetP8_17: P8.17 W24.2 | length 8.4
  Top Layer w0.203: W24.2@62.721,-22.076 63.546,-22.076 65.767,-24.297 68.259,-24.297 P8.17@69.482,-23.074 ; W24.2@62.721,-21.883 W24.2@62.899,-21.883
NetQ1_2: Q1.2 R14.1 | length 5.6
  Top Layer w0.203: Q1.2@14.949,-67.382 15.745,-67.382 16.168,-67.805 16.168,-69.274 16.697,-69.803 R14.1@18.673,-69.803
NetQ2_1: Q2.1 R15.2 | length 1.3
  Top Layer w0.203: 21.103,-65.442 R15.2@22.366,-65.442
NetQ2_3: Q2.3 R14.2 R16.1 | length 5.4
  Top Layer w0.203: Q2.3@19.569,-67.706 20.28,-67.706 20.81,-68.236 R16.1@20.81,-72.142
NetR3_1: R3.1 R5.1 W9.2 W12.2 | length 78.1
  Top Layer w0.203: W9.2@10.59,-66.52 10.736,-66.374 10.736,-64.62 11.765,-63.591 W12.2@13.13,-63.591 ; v1(11.135,-61.035) 12.922,-61.035 R5.1@13.354,-61.467 13.399,-61.512 W12.2@13.399,-63.627 ; v1(11.137,-36.201) 11.137,-36.185 14.706,-32.616 v1(19.596,-32.616) ; v1(30.342,-14.847) 37.203,-14.847 38.48,-16.125 R3.1@39.756,-16.125
  Bottom Layer w0.203: v1@11.137,-61.04 v1(11.137,-36.201) v1@11.137,-36.085 ; v1@19.621,-32.616 19.621,-22.659 27.433,-14.847 v1(30.342,-14.847)
NetU2_1: U2.1 W11.2 W13.2 | length 3.8
  Top Layer w0.203: W13.2@42.027,-17.269 42.029,-17.267 W11.2@43.434,-17.267 ; W11.2@43.508,-17.192 U2.1@43.508,-14.822
NetU2_3: U2.3 W14.2 W15.2 | length 3.9
  Top Layer w0.203: U2.3@44.508,-14.822 44.508,-16.632 44.993,-17.116 W14.2@45.018,-17.142 ; W14.2@44.968,-17.141 45.096,-17.269 W15.2@46.247,-17.269
NetU3_1: U3.1 W18.2 W19.2 | length 4.3
  Top Layer w0.203: U3.1@57.893,-18.904 57.893,-19.691 57.052,-20.532 W18.2@57.052,-21.249 57.179,-21.122 W18.2@57.23,-21.122 W19.2@58.27,-21.122 W19.2@58.626,-21.122
NetU3_3: U3.3 W21.2 W23.2 | length 4.1
  Top Layer w0.203: U3.3@58.893,-18.904 58.893,-19.686 59.85,-20.643 59.85,-20.938 W21.2@59.666,-21.122 ; W21.2@59.844,-21.249 W23.2@61.24,-21.249
PA0: P4.8 U1.23 | length 26.4
  Top Layer w0.203: P4.8@6.449,-48.171 15.519,-48.171 17.04,-46.65 27.113,-46.65 29.527,-44.236 U1.23@31.24,-44.236
PA1: P1.3 U1.24 | length 36.9
  Top Layer w0.203: v2(22.773,-47.492) 23.237,-47.028 27.404,-47.028 29.696,-44.736 U1.24@31.24,-44.736
  Bottom Layer w0.203: P1.3@3.909,-62.402 5.283,-61.028 8.122,-61.028 8.863,-61.769 11.296,-61.769 22.756,-50.309 v2@22.756,-47.492
PA2: P1.5 U1.25 | length 36.7
  Top Layer w0.203: v2(23.501,-48.074) 24.179,-47.396 27.651,-47.396 29.811,-45.236 U1.25@31.24,-45.236
  Bottom Layer w0.203: P1.5@3.909,-64.942 5.221,-63.63 10.054,-63.63 23.526,-50.158 v2@23.526,-48.074
PA3: P4.9 U1.26 | length 31.4
  Top Layer w0.203: P4.9@3.909,-50.711 5.19,-51.992 9.997,-51.992 11.43,-50.559 19.914,-50.559 21.683,-48.79 27.83,-48.79 28.802,-47.818 U1.26@33.045,-47.818
PA4: P4.1 U1.29 | length 54.8
  Top Layer w0.203: P4.1@3.909,-40.551 3.842,-40.551 2.044,-42.349 2.044,-56.008 3.169,-57.133 21.493,-57.133 28.528,-50.098 33.785,-50.098 34.515,-49.368 U1.29@34.515,-47.011
PA5: P4.2 U1.30 | length 63.1
  Top Layer w0.203: P4.2@6.449,-40.551 6.449,-39.32 5.957,-38.828 2.776,-38.828 1.41,-40.194 1.41,-56.081 2.894,-57.565 21.631,-57.565 28.5,-50.696 34.016,-50.696 35.015,-49.697 U1.30@35.015,-47.011
PA6: P6.8 U1.31 | length 40.7
  Top Layer w0.203: U1.31@35.515,-47.011 35.467,-46.963 35.467,-45.761 35.434,-45.729 35.434,-43.834 36.886,-42.383 43.715,-42.383 v1(43.739,-42.407)
  Bottom Layer w0.203: v1(43.739,-42.407) 44.196,-42.407 46.085,-44.296 47.928,-44.296 51.272,-47.64 59.109,-47.64 66.925,-55.456 P6.8@66.942,-55.456
PA7: P1.7 P6.2 U1.32 | length 94.8
  Top Layer w0.203: P1.7@3.909,-67.482 2.598,-66.171 2.598,-58.797 3.2,-58.195 21.571,-58.195 28.568,-51.198 34.275,-51.198 36.015,-49.458 U1.32@36.015,-47.011 36.015,-45.237 37.864,-43.388 v1(42.988,-43.388)
  Bottom Layer w0.203: v1(42.988,-43.388) 42.988,-44.616 44.231,-45.859 47.78,-45.859 51.537,-49.616 59.38,-49.616 64.277,-54.513 64.277,-60.411 P6.2@66.942,-63.076
PA8: P6.1 U1.67 | length 45.4
  Top Layer w0.203: U1.67@46.769,-37.232 49.381,-37.232 57.36,-45.211 57.36,-61.933 60.249,-64.822 69.069,-64.822 69.482,-64.409 P6.1@69.482,-63.076
PA9: P2.7 P6.3 U1.68 W12.1 W17.1 | length 279.2
  Top Layer w0.203: P2.7@3.899,-16.196 5.265,-14.83 5.265,-6.328 10.744,-0.849 61.776,-0.849 72.543,-11.616 72.543,-59.016 71.023,-60.536 P6.3@69.482,-60.536 68.295,-61.723 59.838,-61.723 57.728,-59.613 57.728,-44.979 49.481,-36.732 U1.68@46.769,-36.732 ; v1(12.149,-65.004) 13.403,-65.004 ; W12.1@13.196,-64.414 13.403,-64.487 13.403,-65.004 ; W17.1@13.595,-65.585 13.403,-65.393 13.403,-65.004
  Bottom Layer w0.203: v1(12.149,-65.004) 10.909,-65.004 10.172,-65.741 10.172,-81.506 12.722,-84.056 61.015,-84.056 70.978,-74.093 70.978,-60.842 70.672,-60.536 P6.3@69.482,-60.536
PA10: P2.5 P6.5 U1.69 | length 107
  Top Layer w0.203: v1(33.204,-36.798) 34.454,-36.798 35.418,-37.761 43.192,-37.761 43.663,-37.29 43.663,-37.286 44.713,-36.236 U1.69@46.79,-36.236 ; U1.69@46.769,-36.232 49.668,-36.232 58.157,-44.721 58.157,-56.878 60.466,-59.187 68.291,-59.187 P6.5@69.482,-57.996
  Bottom Layer w0.203: P2.5@3.899,-13.656 5.076,-14.833 12.477,-14.833 17.042,-19.398 17.042,-27.236 14.224,-30.054 14.224,-33.915 17.423,-37.114 24.507,-37.114 25.924,-35.697 31.636,-35.697 32.737,-36.798 v1(33.204,-36.798)
PA11: U1.70 W8.1 W11.1 W18.1 | length 81
  Top Layer w0.203: v1(11.443,-23.331) W8.1@10.923,-23.331 ; v1(13.689,-21.656) 13.787,-21.558 v1(24.918,-21.558) ; v1(30.328,-18.548) 33.706,-18.548 35.199,-20.041 v1(41.311,-20.041) ; v1(43.43,-18.816) 43.43,-18.261 W11.1@43.637,-18.054 ; v1@44.389,-35.223 44.902,-35.736 U1.70@46.79,-35.736 ; v1@44.39,-35.222 v1(44.39,-35.165) ; v1(45.954,-14.846) 48.516,-14.846 48.99,-14.372 v1(51.073,-14.372) ; v1(56.023,-22.042) 56.029,-22.036 W18.1@56.849,-22.036 W18.1@57.255,-22.036 ; W8.1@10.923,-23.331 W8.1@10.799,-23.207 W8.1@10.393,-23.207 10.516,-23.331 W8.1@10.923,-23.331
  Bottom Layer w0.203: v1(11.443,-23.331) 12.014,-23.331 v1(13.689,-21.656) ; v1(24.918,-21.558) 24.918,-19.949 26.319,-18.548 v1(30.328,-18.548) ; v1(41.311,-20.041) 41.331,-20.061 43.43,-20.061 ; v1(44.39,-35.165) 44.39,-27.768 43.43,-26.808 43.43,-20.061 ; v1(45.954,-14.846) 44.261,-14.846 43.43,-15.677 v1(43.43,-18.816) 43.43,-20.061 ; v1(51.073,-14.372) 51.805,-14.372 53.679,-16.246 53.679,-21 54.721,-22.042 v1(56.023,-22.042)
PA12: U1.71 W7.1 W14.1 W20.1 W21.1 | length 114.5
  Top Layer w0.203: W7.1@10.792,-19.161 11.823,-19.161 13.61,-20.948 v1(23.814,-20.948) ; v1(30.316,-17.697) 33.649,-17.697 35.323,-19.371 41.76,-19.371 42.651,-20.262 v1(44.21,-20.262) ; v1(44.832,-18.816) 44.832,-18.268 W14.1@45.044,-18.056 ; v1(45.016,-34.048) 45.016,-34.747 45.505,-35.236 U1.71@46.79,-35.236 49.702,-35.236 58.627,-44.161 58.627,-55.073 60.118,-56.564 62.178,-56.564 62.589,-56.153 62.589,-55.09 W20.1@62.426,-55.09 ; v1(45.918,-15.877) 49.06,-15.877 49.917,-15.02 v1(53.534,-15.02) ; v1(59.831,-22.774) 59.831,-22.226 W21.1@59.641,-22.036 W21.1@60.047,-22.036
  Bottom Layer w0.203: v1(23.814,-20.948) 23.814,-19.622 25.739,-17.697 v1(30.316,-17.697) ; v1(45.016,-34.048) 45.016,-27.534 44.21,-26.728 v1(44.21,-20.262) 44.21,-19.5 44.805,-18.905 44.832,-18.932 v1(44.832,-18.816) 44.832,-16.361 45.316,-15.877 v1(45.918,-15.877) ; v1(53.534,-15.02) 54.148,-15.634 54.148,-19.341 55.36,-20.553 58.879,-20.553 59.831,-21.505 v1(59.831,-22.774)
PA13: P5.5 P7.1 P8.3 R8.1 U1.72 | length 134.4
  Top Layer w0.203: P5.5@20.328,-3.899 21.595,-5.166 21.595,-8.006 22.436,-8.847 24.749,-8.847 25.645,-9.743 R8.1@25.645,-10.539 26.992,-10.539 27.486,-11.033 27.486,-14.476 26.263,-15.699 P7.1@24.223,-15.699 ; v1(44.203,-3.162) 46.038,-1.327 61.462,-1.327 72.044,-11.909 72.044,-39.515 70.705,-40.854 P8.3@69.482,-40.854 68.131,-39.503 63.491,-39.503 57.788,-33.8 53.561,-33.8 52.625,-34.736 U1.72@46.79,-34.736
  Bottom Layer w0.203: P5.5@20.328,-3.899 21.601,-5.172 40.557,-5.172 42.567,-3.162 v1(44.203,-3.162)
PA14: P5.7 P7.2 P8.5 R9.1 U1.76 | length 102.9
  Top Layer w0.203: P5.7@17.95,-3.899 17.95,-4.306 19.076,-5.432 19.076,-6.916 19.865,-7.706 19.926,-7.706 21.683,-9.463 21.683,-10.556 ; P7.2@21.683,-15.699 21.683,-10.556 ; R9.1@22.912,-10.504 R9.1@22.947,-10.539 21.7,-10.539 21.683,-10.556 ; U1.76@45.015,-31.461 45.015,-30.164 45.479,-29.7 v1@47.4,-29.7 ; v1(61.325,-34.654) 63.635,-36.964 68.132,-36.964 P8.5@69.482,-38.314
  Bottom Layer w0.203: P5.7@17.788,-3.899 17.788,-2.777 19.036,-1.529 45.23,-1.529 47.38,-3.679 v1@47.38,-29.723 ; v1(47.4,-29.723) 49.105,-29.723 54.66,-35.278 58.989,-35.278 59.613,-34.654 v1(61.325,-34.654)
PA15: P5.3 P8.7 R7.1 U1.77 | length 84.8
  Top Layer w0.203: U1.77@44.515,-31.461 44.515,-29.416 45.027,-28.904 v1(46.595,-28.904) 49.467,-28.904 R7.1@49.486,-28.923 ; v1(52.138,-33.987) 52.826,-33.299 61.08,-33.299 61.697,-33.916 63.925,-33.916 64.522,-34.513 68.221,-34.513 P8.7@69.482,-35.774
  Bottom Layer w0.203: P5.3@22.868,-3.899 22.868,-3.741 24.482,-2.127 44.9,-2.127 46.595,-3.822 v1(46.595,-28.904) 46.595,-30.447 50.135,-33.987 v1(52.138,-33.987)
PB0: P6.4 U1.35 | length 41.6
  Top Layer w0.203: U1.35@37.494,-47.007 37.494,-44.848 38.353,-43.989 42.738,-43.989 v1@43.779,-43.99
  Bottom Layer w0.203: v1(43.78,-43.989) 43.78,-44.838 44.299,-45.357 47.849,-45.357 51.435,-48.943 59.228,-48.943 64.839,-54.554 64.839,-58.433 P6.4@66.942,-60.536